# Altium PCB RPi_CWHUSKY_Target.PcbDoc (part 2 of 2)
Units mil, origin at the board's own origin, x right, y up, seen from the top; angles counter-clockwise.
Board outline 2623.51 x 2391.28 mil, 4 copper layers (Top Layer, Layer 1, Layer 2, Bottom Layer), stack 23.756 mil thick; 85 components, 89 nets, 390 pads, 172 vias.
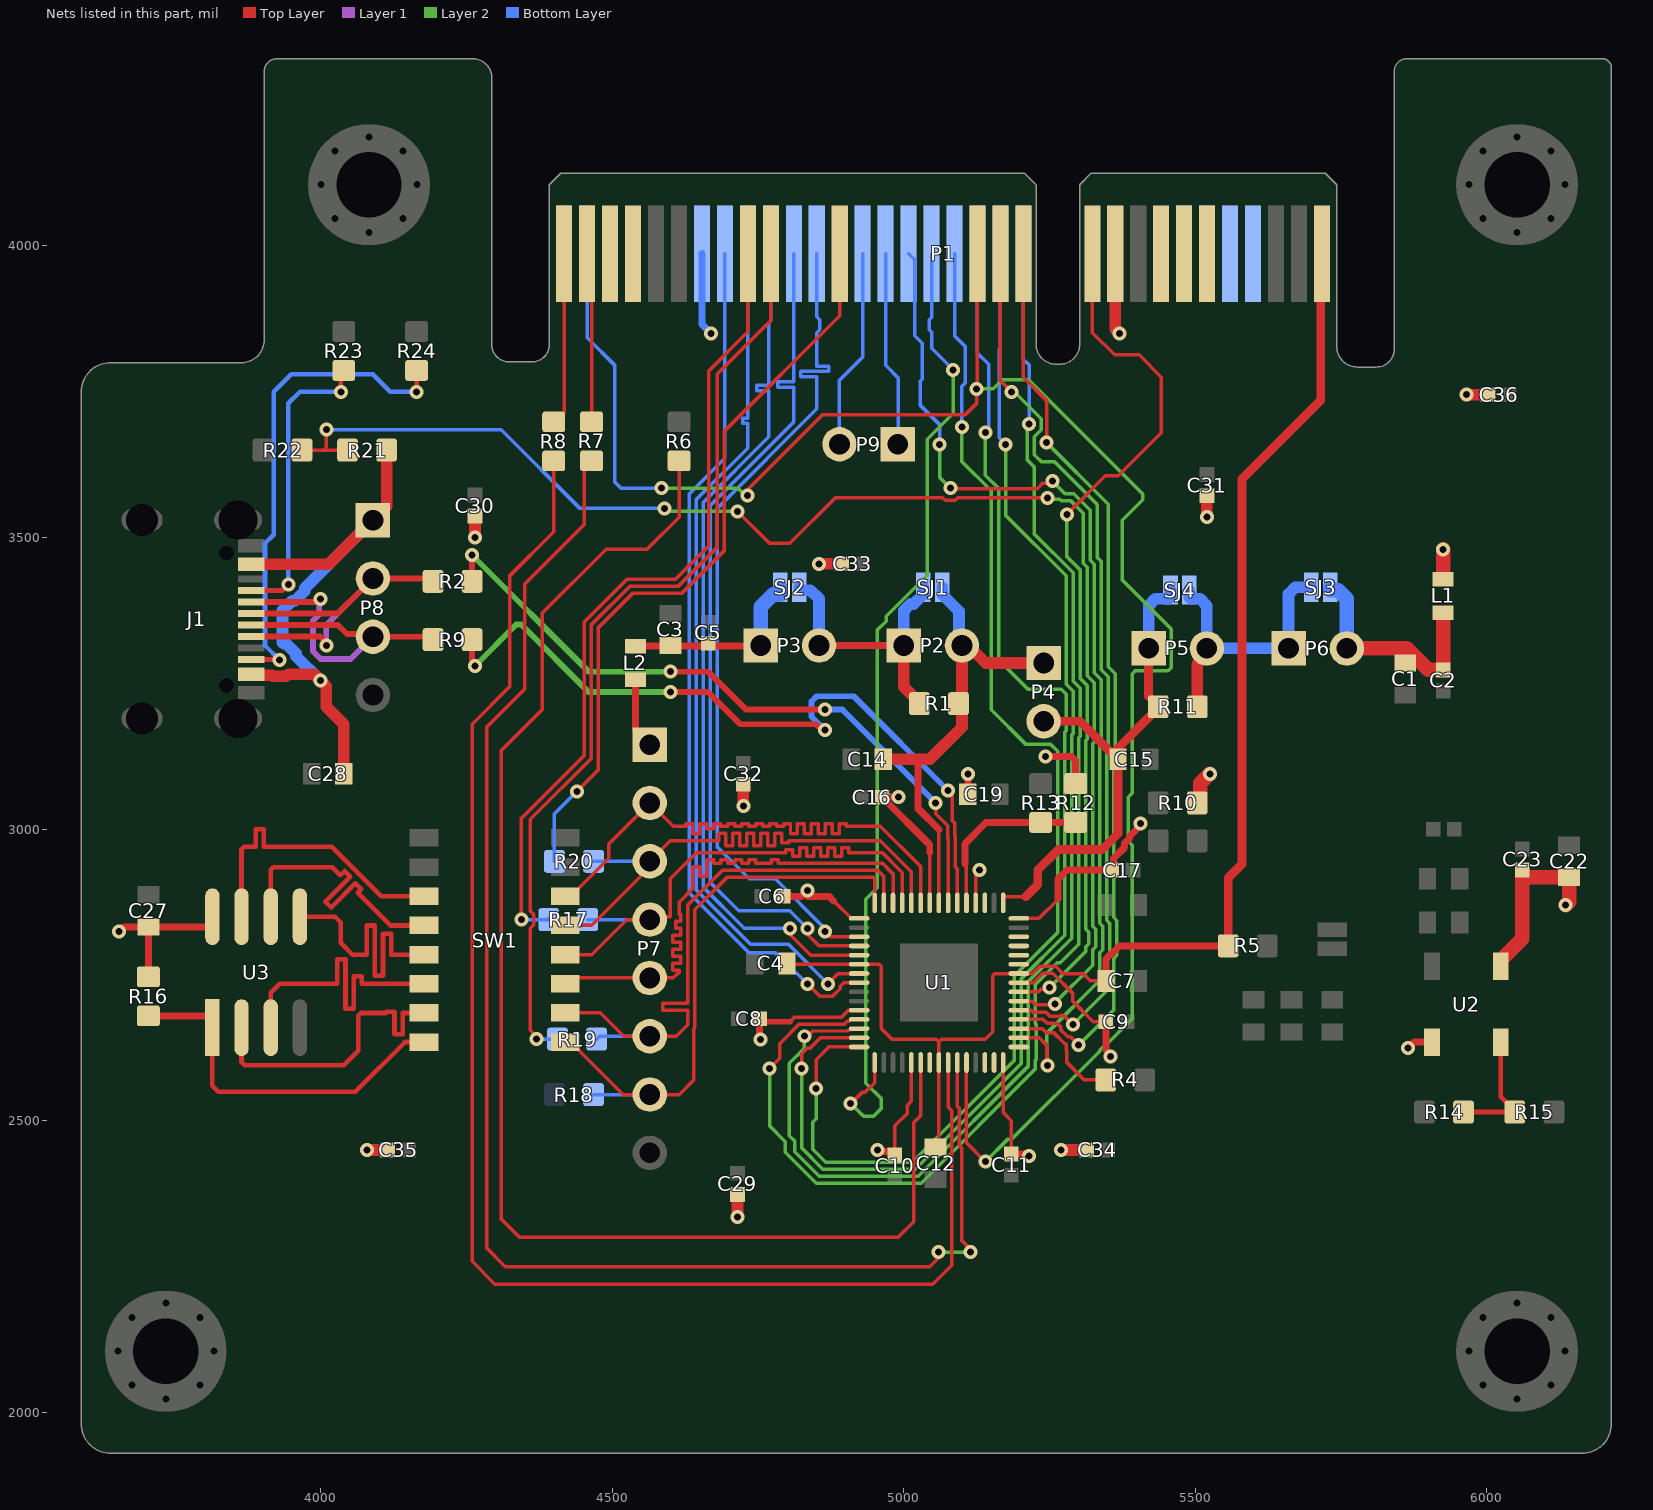
[diagram p4: the nets of this part, all layers, seen from the top]

## Via types
v1: diameter 24, hole 12, Top Layer to Bottom Layer, tented both sides, 166 vias
v2: diameter 24, hole 12, Top Layer to Bottom Layer, 6 vias

## Nets (pads, with @x,y where several pads share a name; then routed paths per layer and width w, separated by ;. In a path a pad name is that pad's centre, name@x,y a point inside that pad or via, vN(x,y) a via of type N, cw(c..) or ccw(c..) an arc to the next point about the centre after c; other vN are vias at no path point) (continued)
GPIO8: P1.A12 U1.12 | length 2366.3
  Top Layer w6: v1(4770,2590) 4787.46,2607.46 4787.46,2632.16 4821.3,2666 4898.58,2666 4903.59,2671.01 4906.6,2671.01 4909.41,2673.82 U1.12@4923.7,2673.82
  Layer 2 w6: v1(4770,2590) 4770,2491.36 4797.17,2464.2 4797.17,2445.86 4850.03,2393 4868.36,2393 5029.97,2393 5226,2589.03 5226,2603.7 5227,2604.7 5227,2665.35 5226,2666.35 5226,2734.03 5263.25,2771.28 5268.22,2771.28 5300,2803.06 5300,3156.57 5302.53,3159.1 5302.53,3241.41 5290.53,3253.41 5290.53,3439.47 5223.87,3506.13 5223.87,3621.13 5212,3633 5212,3692 v1(5215,3695)
  Bottom Layer w6: P1.A12@5205.36,3986.98 5205.36,3805.97 5215,3796.33 v1(5215,3695)
GPIO9: P1.A13 U1.13 | length 2286.2
  Top Layer w6: v1(4830,2645) 4834.87,2645 4843.87,2654 4903.55,2654 4904.81,2655.26 4906.6,2655.26 4909.41,2658.07 U1.13@4923.7,2658.07
  Layer 2 w6: v1(4830,2645) 4829.3,2644.3 4829.3,2624 4804,2598.7 4804,2474.33 4813,2465.33 4813,2447 4855,2405 5025,2405 5214,2594 5214,2739 5288,2813 5288,3161.54 5290.53,3164.07 5290.53,3236.44 5278.53,3248.44 5278.53,3434.5 5175.49,3537.54 5175.49,3659.51 v1(5175,3660)
  Bottom Layer w6: P1.A13@5165.99,3986.98 5165.99,3825.3 5164,3823.31 5164,3671 v1(5175,3660)
GPIO10: P1.A14 U1.14 | length 2260
  Top Layer w6: v1(4825,2590) 4825,2615 4834,2624 4838.7,2624 4856.7,2642 4923.38,2642 U1.14@4923.7,2642.32
  Layer 2 w6: v1(4825,2590) 4825,2453.33 4861.33,2417 5020.03,2417 5202,2598.97 5202,2743.97 5276,2817.97 5276,3166.51 5278.53,3169.04 5278.53,3231.47 5270,3240 5213.22,3240 5163.49,3289.73 5163.49,3583.49 5140,3606.97 v1(5140,3680)
  Bottom Layer w6: P1.A14@5126.62,3986.98 5126.62,3816.34 5146,3796.96 5146,3686 v1(5140,3680)
GPIO11: P1.A15 U1.15 | length 2183.4
  Top Layer w6: v1(4850,2555) 4850,2605 4871.57,2626.57 U1.15@4923.7,2626.57
  Layer 2 w6: v1(4850,2555) 4850,2503.72 4844,2497.72 4844,2451.3 4866.3,2429 5015.06,2429 5190,2603.94 5190,2748.94 5264,2822.94 5264,3133.7 5251.7,3146 5209,3146 5149.93,3205.07 5149.93,3580.07 5100,3630 v1(5100,3690)
  Bottom Layer w6: P1.A15@5087.25,3986.98 5087.25,3845.88 5106,3827.13 5106,3765.7 5100,3759.7 v1(5100,3690)
GPIO12: P1.A16 U1.16 | length 1714.7
  Top Layer w6: v1(4909.16,2529.75) 4909.75,2529.75 4929.36,2549.36 4934.36,2549.36 4950.28,2565.28 U1.16@4950.28,2600
  Layer 2 w6: v1(4909.16,2529.75) 4929.8,2509.12 4930.62,2509.12 4931.54,2508.2 4948.93,2508.2 4961.23,2520.5 4961.23,2538.46 4935,2564.7 4935,2880 4954.71,2899.71 4954.71,3341.5 4970,3356.78 4970,3365 5040.53,3435.53 5040.53,3668.7 5085,3713.17 v1(5085,3787.59)
  Bottom Layer w6: P1.A16@5047.88,3986.98 5047.88,3877.58 5044,3873.7 5044,3856.3 5047.88,3852.42 5047.88,3824.71 v1(5085,3787.59)
GPIO17: U1.28
GPIO18: U1.29
GPIO19: U1.31
GPIO20: P1.A17 U1.32 | length 1790.5
  Top Layer w6: v1(5080,3585) 5081,3584 5229.24,3584 5238.8,3593.56 5251.53,3593.56 v1(5254.97,3597) ; U1.32@5197.32,2642.32 5232.68,2642.32 5245,2630 5245,2597 v1(5247,2595)
  Layer 2 w6: v1(5061.53,3660) 5061.53,3603.47 v1(5080,3585) ; v1(5247,2595) 5245,2597 5245,2649.7 5336,2740.7 5336,2788.15 5341.47,2793.62 5341.47,2833.38 5336,2838.85 5336,3141.66 5338.53,3144.19 5338.53,3256.32 5326.53,3268.32 5326.53,3385.72 ; v1(5254.97,3597) 5276.69,3575.28 5283.72,3575.28 5291.39,3575.28 5320,3546.67 5320,3460.91 5326.53,3454.38 5326.53,3388.66
  Bottom Layer w6: P1.A17@5008.51,3986.98 5019.29,3976.2 5019.29,3845.78 5031.93,3833.14 5031.93,3771.61 5028.11,3767.79 5028.11,3727.34 5061.53,3693.92 v1(5061.53,3660)
GPIO21: R4.2 U1.33 | length 203.3
  Top Layer w6: U1.33@5197.32,2658.07 5238.03,2658.07 5244.77,2651.33 5257,2651.33 5276.33,2632 5278,2632 5279,2631 5279,2621.3 5280,2620.3 5280,2600 5310,2570 R4.2@5346.54,2570
GPIO24: R21.2 R22.1 U1.36 | length 2487.4
  Top Layer w6: R22.1@3968.46,3650 4005,3650 ; v1(4010,3685) 4010,3655 4005,3650 ; R21.2@4046.54,3650 4005,3650 ; v1(4715,3545) 4770,3490 4805,3490 4883.08,3568.08 5067.22,3568.08 5071.3,3564 5088.7,3564 5092.78,3568.08 v1(5246.99,3568.08) ; U1.36@5197.32,2705.31 5219.99,2705.31 5226.3,2699 5258.47,2699 v1(5259.61,2700.13)
  Layer 2 w6: v1(4590,3550) 4595,3545 v1(4715,3545) ; v1(5246.99,3568.08) 5249.29,3565.78 5267.99,3565.78 5270.99,3562.78 5286.92,3562.78 5308,3541.7 5308,3455.94 5314.53,3449.41 5314.53,3263.35 5326.53,3251.35 5326.53,3149.16 5324,3146.63 5324,2833.88 5329.47,2828.41 5329.47,2798.59 5324,2793.12 5324,2767 5259.61,2702.61 v1(5259.61,2700.13)
  Bottom Layer w6: v1(4010,3685) 4310,3685 4445,3550 v1(4590,3550)
GPIO26_ADC0: U1.40
GPIO27_ADC1: U1.41
GPIO28_ADC2: U1.42
GPIO29_ADC3: U1.43
HDR10: P1.A18 P9.1 | length 336.5
  Bottom Layer w6: P1.A18@4969.14,3986.98 4969.14,3795.56 4991,3773.7 4991,3661 P9.1@4990,3660
IOVREF: C6.1 C8.1 C9.1 C10.1 C11.1 C16.1 C17.1 C19.1 C22.1 C23.1 C27.1 C29.1 C30.1 C31.1 C32.1 C33.1 C34.1 C35.1 C36.1 L1.2 L2.1 P1.A5 P1.A26 P1.B10 P7.1 R10.1 R12.1 R16.1 U1.1 U1.11 U1.20 U1.30 U1.38 U1.45 U1.49 U1.54 U2.1 U2.4 U3.8 | length 3202.6
  Top Layer w6: 4805,2670 4813,2678 4893.61,2678 4904.82,2689.21 4923.34,2689.21 U1.11@4923.7,2689.57 ; 4880,2876.97 4909.92,2847.05 U1.1@4923.7,2847.05 ; C10.1@4985,2441.22 4985,2491.36 5005.77,2512.13 5005.77,2525.77 5013.27,2533.27 U1.20@5013.27,2600 ; U1.54@5044.76,2873.62 5044.76,2960.24 ; U1.49@5123.5,2873.62 5123.5,2923.5 v1(5130,2930) ; U1.30@5170.75,2600 5170.75,2514.25 5184.76,2500.24 C11.1@5184.76,2443.11 ; U1.38@5197.32,2736.81 5222.11,2736.81 5238.3,2753 5255.7,2753 5290.38,2718.32 5290.38,2704.68 5325.06,2670 C9.1@5346.65,2670 ; U1.45@5197.32,2847.05 5232.05,2847.05 5265,2880
  Top Layer w10: C8.1@4753.11,2675 4758.11,2670 4805,2670
  Top Layer w12: v1(3655,2825) 3662.44,2832.44 C27.1@3705,2832.44 ; R16.1@3705,2746.93 C27.1@3705,2832.44 ; U3.8@3814.76,2850 3814.76,2838.24 3808.97,2832.44 C27.1@3705,2832.44 ; L2.1@4540,3256.26 4540,3169.76 P7.1@4564.76,3145 ; C8.1@4753.11,2675 4753.19,2674.92 4753.19,2640.65 v1(4754.49,2639.35) ; C6.1@4793.11,2885 4825,2885 v1(4835,2895) ; v1@4835,2885 4871.97,2885 4880,2876.97 ; v1(4955,2450) 4957.3,2447.7 4978.52,2447.7 C10.1@4985,2441.22 ; v1(4991,3055) C16.1@4963.11,3055 5044.76,2973.35 5044.76,2960.24 ; C19.1@5110,3060 v1(5110,3095) ; C11.1@5184.76,2443.11 5211.89,2443.11 v1(5215,2440) ; v1(5243,3125) 5287.97,3125 5295,3117.97 R12.1@5295,3078.46 ; 5265,2880 5265,2915 5280,2930 C17.1@5356.89,2930 5360,2933.11 5360,2950 5379.09,2969.09 5379.09,2976.2 5386.94,2984.04 5386.94,2987.29 5406,3006.35 v1(5406,3009.59) ; C9.1@5346.65,2670 5346.65,2621.59 5354.87,2613.37 v1(5354.87,2610.13) ; v1(5865,2625) 5875,2635 U2.1@5905.94,2635
  Top Layer w20: v1(4080,2450) C35.1@4116.89,2450 ; v1(4265,3500) C30.1@4265,3536.89 ; v1(4715,2335) C29.1@4715,2376.89 ; v1(4725,3040) C32.1@4725,3076.89 ; v1(4855,3455) C33.1@4896.89,3455 ; v1(5270,2450) C34.1@5311.89,2450 ; P1.B10@5362.84,3986.98 5362.84,3857.16 v1(5370,3850) ; v1(5520,3535) C31.1@5520,3571.89 ; v1(5965,3745) C36.1@6001.89,3745
  Top Layer w25: R10.1@5503.46,3045 5508.68,3050.22 5508.68,3078.68 v1(5525,3095) ; L1.2@5925,3428.74 v1(5925,3480) ; U2.4@6024.06,2764.92 6024.06,2775.16 6060.94,2812.05 6060.94,2915 6063.39,2917.44 C22.1@6140.94,2917.44 6140.94,2875.94 v1(6135,2870)
  Bottom Layer w12: P1.A26@4654.18,3986.98 4654.18,3865.82 v1(4670,3850)
JTAG_TCK: P1.B32 R8.2 | length 296.7
  Top Layer w6: R8.2@4400,3698.46 4401.19,3698.46 4417.96,3715.23 P1.B32@4417.96,3986.98
JTAG_TDI: P1.B29
JTAG_TDO: P1.B30
JTAG_TMS: P1.B31 R7.2 | length 291.7
  Top Layer w6: P1.B31@4457.33,3986.98 4465,3979.31 R7.2@4465,3698.46
JTAG_TRST: P1.A32
LED1: P1.B11 U1.37 | length 1513.6
  Top Layer w6: U1.37@5197.32,2721.06 5231.19,2721.06 5235.35,2725.22 5246.89,2725.22 v1(5250.33,2728.67) ; v1(5280,3540) 5346,3606 5367.97,3606 5442,3680.03 5442,3774.97 5403.72,3813.25 5361.75,3813.25 5323.47,3851.53 P1.B11@5323.47,3986.98
  Layer 2 w6: v1(5250.33,2728.67) 5312,2790.33 5312,2798.09 5317.47,2803.56 5317.47,2823.44 5312,2828.91 5312,3151.6 5314.53,3154.13 5314.53,3236.83 5314.53,3246.38 5302.53,3258.38 5302.53,3444.44 5280,3466.97 v1(5280,3540)
LED2: P1.B12 U1.34 | length 1576.1
  Top Layer w6: U1.34@5197.32,2673.82 5239.25,2673.82 5245.94,2667.13 5262.87,2667.13 5269,2661 5269,2656.3 5281.3,2644 5286,2644 v1(5300,2630) ; P1.B12@5205.36,3986.98 5205.36,3774.64 5245,3735 v1(5245,3663)
  Layer 2 w6: v1(5245,3663) 5350.53,3557.47 5350.53,3278.27 5362.53,3266.27 5362.53,3134.25 5360,3131.72 5360,2848.79 5365.47,2843.32 5365.47,2783.68 5360,2778.21 5360,2690 v1(5300,2630)
LED3: P1.B13 U1.35 | length 1558.2
  Top Layer w6: P1.B13@5165.99,3986.98 5165.99,3769.01 v1(5185,3750) ; U1.35@5197.32,2689.57 5197.68,2689.21 5219.12,2689.21 5222.51,2685.82 5244.22,2685.82 5250.91,2679.13 5268.3,2679.13 5270.17,2681 5274,2681 v1(5290,2665)
  Layer 2 w6: v1(5185,3750) 5189.7,3750 5236,3703.7 5236,3685 5224,3673 5224,3642.3 5236.3,3630 5258.7,3630 5332,3556.7 5332,3465.88 5338.53,3459.35 5338.53,3273.3 5350.53,3261.3 5350.53,3139.22 5348,3136.69 5348,2843.82 5353.47,2838.35 5353.47,2788.65 5348,2783.18 5348,2723 v1(5290,2665)
MISO: P1.B23 R19.2 | length 1611.9
  Top Layer w6: v1(4370.24,2640) 4370.24,2644.87 4360,2655.11 4360,2830.3 4366,2836.3 4366,2853.7 4360,2859.7 4360,3016.97 4464,3120.97 4464,3350.06 4530.94,3417 4613.97,3417 4680,3483.03 4680,3780 4772.29,3872.29 P1.B23@4772.29,3986.98
  Bottom Layer w6: v1(4370.24,2640) R19.2@4406.54,2640
MOSI: P1.B24 R17.2 | length 1400.6
  Top Layer w6: v1(4345,2845) 4344,2846 4344,3017.94 4452,3125.94 4452,3355.03 4525.97,3429 4609,3429 4666.18,3486.18 4666.18,3786.18 4732.92,3852.92 P1.B24@4732.92,3986.98
  Bottom Layer w6: v1(4345,2845) R17.2@4391.54,2845 R17.2@4390.2,2846.34
NetC1_1: C1.1 C2.1 L1.1 P6.2 SJ3.2 | length 403.6
  Top Layer w25: P6.2@5760,3310 5862.75,3310 5899.64,3273.11 C2.1@5925,3273.11 L1.1@5925,3371.26
  Bottom Layer w25: SJ3.2@5731.22,3415 5731.22,3410 5745.36,3410 5760,3395.36 P6.2@5760,3310
NetC3_1: C3.1 C5.1 L2.2 P3.1 SJ2.1 | length 336.8
  Top Layer w12: L2.2@4540,3313.74 4753.74,3313.74 P3.1@4755,3315
  Bottom Layer w25: P3.1@4755,3315 4755,3381.22 4776.28,3402.5 4788.78,3402.5 SJ2.1@4788.78,3415
NetC14_1: C14.1 P2.2 P4.1 R1.2 SJ1.2 U1.53 | length 825.2
  Top Layer w6: U1.53@5060.51,2873.62 5060.51,2999.49
  Top Layer w12: 5025,3120 5025,3035 5060.51,2999.49
  Top Layer w20: C14.1@4965.12,3120 5025,3120 5045,3120 5100,3175 P2.2@5100,3315 5110.57,3315 5140.57,3285 P4.1@5240,3285
  Bottom Layer w20: SJ1.2@5066.22,3415 5066.22,3402.5 5095,3373.72 5095,3320 P2.2@5100,3315
NetC28_1: C28.1 J1.A4-B9 J1.B4-A9 P8.1 R21.1 | length 1043.4
  Top Layer w20: J1.B4-A9@3881.34,3265.51 3883.15,3263.7 3916.7,3263.7 3918.4,3262 3941.6,3262 3945.11,3265.51 3989.49,3265.51 v1(3999.74,3255.26) 4010,3245 4010,3210 4040.12,3179.88 C28.1@4040.12,3095 ; J1.A4-B9@3881.34,3454.49 4014.49,3454.49 P8.1@4090,3530 4113.46,3553.46 R21.1@4113.46,3650
  Bottom Layer w20: v1(3999.74,3255.26) 3958,3297 3958,3301.6 3941.6,3318 3937,3318 3935,3320 3935,3375 3952,3392 3956.6,3392 3973,3408.4 3973,3413 P8.1@4090,3530
NetJ1_A5: J1.A5 R23.1 | length 515
  Top Layer w8: J1.A5@3881.34,3409.21 3934.21,3409.21 v2(3945,3420) ; v2(4035,3750) 4035,3781.54 R23.1@4040,3786.54
  Bottom Layer w8: v2(3945,3420) 3945,3730 3965,3750 v2(4035,3750)
NetJ1_B5: J1.B5 R24.1 | length 832.1
  Top Layer w8: J1.B5@3881.34,3291.1 3928.9,3291.1 v2(3930,3290) ; v2(4165,3750) R24.1@4165,3786.54
  Bottom Layer w8: v2(3930,3290) 3905,3315 3905,3490 3920,3505 3920,3750 3950,3780 4090,3780 4120,3750 v2(4165,3750)
NetP2_1: P2.1 P3.2 R1.1 SJ1.1 SJ2.2 | length 496.9
  Top Layer w12: P3.2@4855,3315 P2.1@5000,3315
  Top Layer w20: P2.1@5000,3315 5000,3244.28 5027.05,3217.23 R1.1@5027.05,3215.26
  Bottom Layer w20: SJ2.2@4821.22,3415 4821.22,3412.5 4823.72,3410 4840,3410 4855,3395 P3.2@4855,3315 ; P2.1@5000,3315 5000,3374.53 5011.72,3386.24 5017.53,3386.24 5033.78,3402.5 SJ1.1@5033.78,3415
NetP5_2: P5.2 P6.1 R11.2 SJ3.1 SJ4.2 | length 505.4
  Top Layer w20: R11.2@5503.46,3210 5503.46,3282.9 5520,3299.43 P5.2@5520,3310
  Bottom Layer w20: SJ4.2@5490,3410 5490,3397.5 5492.5,3395 5508.28,3395 5520,3383.28 P5.2@5520,3310 P6.1@5660,3310 5660,3403.28 5671.72,3415 SJ3.1@5698.78,3415
NetR14_2: R14.2 R15.1 U2.3 | length 218
  Top Layer w8: R14.2@5960,2515 R15.1@6048.07,2515 6048.07,2517.2 6024.06,2541.22 U2.3@6024.06,2635
NetR16_2: R16.2 SW1.16 U3.1 | length 628.2
  Top Layer w8: U3.1@3814.76,2659.76 3814.76,2560.24 3825,2550 4060,2550 4145,2635 SW1.16@4177.64,2635
  Top Layer w12: R16.2@3705,2680 3808.49,2680 3814.76,2673.73 U3.1@3814.76,2659.76
NetSW1_11: SW1.11 U3.7 | length 524.7
  Top Layer w8: U3.7@3864.76,2850 3864.76,2965.31 3869.45,2970 3885,2970 3889,2970 3889,2999.67 3903,2999.67 3903,2970 3995,2970 4019.53,2970 4104.53,2885 SW1.11@4177.64,2885
NetSW1_12: SW1.12 U3.6 | length 524.7
  Top Layer w8: U3.6@3914.76,2850 3914.76,2930.31 3919.45,2935 4020,2935 4031.25,2923.75 4034.08,2920.92 4041.44,2928.29 4051.34,2918.39 4008.62,2875.67 4018.52,2865.77 4060,2907.24 4069.89,2897.34 4063.78,2891.22 4090,2865 4095,2860 4120,2835 SW1.12@4177.64,2835
NetSW1_13: SW1.13 U3.5 | length 504.3
  Top Layer w8: U3.5@3964.76,2850 4025,2850 4035,2840 4035,2805 4055,2785 4075.25,2785 4079.25,2785 4079.25,2835 4093.25,2835 4093.25,2749 4107.25,2749 4107.25,2821 4121.25,2821 4121.25,2785 4130,2785 SW1.13@4177.64,2785
NetSW1_14: SW1.14 U3.3 | length 524.7
  Top Layer w8: U3.3@3914.76,2659.76 3914.76,2719.76 3930,2735 4025,2735 4029,2735 4029,2777.2 4043,2777.2 4043,2692.11 4057,2692.11 4057,2747.66 4071,2747.66 4071,2735 4120,2735 SW1.14@4177.64,2735
NetSW1_15: SW1.15 U3.2 | length 524.4
  Top Layer w8: U3.2@3864.76,2659.76 3864.76,2600.24 3870,2595 4040,2595 4065,2620 4065,2680.31 4069.69,2685 4070,2685 4070.62,2685 4113,2685 4113,2687.02 4127,2687.02 4127,2648.42 4141,2648.42 4141,2685 4145,2685 SW1.15@4177.64,2685
nRST: P1.A31 P1.B14 U1.26 | length 3297.8
  Top Layer w6: v1(4732.51,3572.49) 4730,3575 4730,3580 4861,3711 5106,3711 5125,3730 v1(5125,3755) 5126.62,3756.62 P1.B14@5126.62,3986.98 ; U1.26@5107.76,2600 5107.76,2462.24 v1(5140,2430)
  Layer 2 w6: v1(4585,3585) 4715.31,3585 4727.82,3572.49 v1(4732.51,3572.49) ; v1(5125,3755) 5153.78,3755 5169.78,3771 5213.7,3771 5410,3574.7 5410,3565 5374.53,3529.53 5374.53,3427.26 5458.53,3343.26 5458.53,3276.74 5453.26,3271.47 5397.26,3271.47 5392,3266.22 5392,3062 5385,3055 5385,2979.73 5392,2972.73 5392,2675.33 5345.67,2629 5344.05,2629 5336,2620.95 5336,2619.33 5184.67,2468 5178,2468 v1(5140,2430)
  Bottom Layer w6: P1.A31@4457.33,3986.98 4457.33,3842.67 4505,3795 4505,3595 4515,3585 v1(4585,3585)
nRST_OUT: P1.A19 P9.2 | length 343.5
  Bottom Layer w6: P9.2@4890,3660 4890,3770 4929.77,3809.77 P1.A19@4929.77,3986.98
QSPI_SCLK: P7.3 R20.2 SW1.5 U1.56 | length 1031
  Top Layer w6: SW1.5@4419.76,2835 4465,2835 4564.76,2934.76 P7.3@4564.76,2945 4599.76,2980 4680,2980 4683,2980 4683,2993 4695,2993 4695,2972 4707,2972 4707,2993 4719,2993 4719,2972 4731,2972 4731,2993 4743,2993 4743,2972 4755,2972 4755,2993 4767,2993 4767,2972 4779,2972 4779,2993 4791,2993 4791,2977.12 4803,2977.12 4803,2980 4835,2980 4960,2980 5013.27,2926.73 U1.56@5013.27,2873.62
  Bottom Layer w6: R20.2@4468.23,2945 P7.3@4564.76,2945
QSPI_SD0: P7.4 R17.1 SW1.4 U1.57 | length 983
  Top Layer w6: SW1.4@4419.76,2785 4465,2785 4525,2845 P7.4@4564.76,2845 4569.76,2850 4600,2850 4600,2915 4645,2960 4795,2960 4798,2960 4798,2965.12 4810,2965.12 4810,2954 4822,2954 4822,2968 4834,2968 4834,2954 4846,2954 4846,2968 4858,2968 4858,2954 4870,2954 4870,2968 4882,2968 4882,2954 4894,2954 4894,2968 4906,2968 4906,2960 4910,2960 4963.03,2960 4997.52,2925.51 U1.57@4997.52,2873.62
  Bottom Layer w6: R17.1@4458.46,2845 P7.4@4564.76,2845
QSPI_SD1: P7.6 R19.1 SW1.2 U1.59 | length 1031
  Top Layer w6: SW1.2@4419.76,2685 4480,2685 4520,2645 P7.6@4564.76,2645 4610,2645 4630,2665 4630,2686.25 4630,2689.25 4586.62,2689.25 4586.62,2701.25 4630,2701.25 4630,2745 4630,2870 4690,2930 4955,2930 4966.02,2918.98 U1.59@4966.02,2873.62
  Bottom Layer w6: R19.1@4473.46,2640 4478.46,2645 P7.6@4564.76,2645
QSPI_SD2: P7.5 SW1.3 U1.58 | length 998.6
  Top Layer w6: SW1.3@4419.76,2735 4429.76,2745 P7.5@4564.76,2745 4605,2745 4614.92,2754.92 4615,2755 4615,2757.92 4604.06,2757.92 4604.06,2769.92 4618,2769.92 4618,2781.92 4604.06,2781.92 4604.06,2793.92 4618,2793.92 4618,2805.92 4604.06,2805.92 4604.06,2817.92 4618,2817.92 4618,2829.92 4608.87,2829.92 4608.87,2841.92 4618,2841.92 4618,2853.92 4615,2853.92 4615,2860 4615,2875 4635,2895 4638,2898 4638,2936.03 4650,2936.03 4650,2918.97 4662,2918.97 4662,2948 4674,2948 4674,2941.31 4686,2941.31 4686,2948 4698,2948 4698,2942 4710,2942 4710,2948 4722,2948 4722,2942 4734,2942 4734,2948 4746,2948 4746,2942 4770,2942 4773,2942 4773,2948 4785,2948 4785,2942 4790,2942 4963,2942 4981.77,2923.23 U1.58@4981.77,2873.62
QSPI_SD3: P7.2 SW1.6 U1.55 | length 1031
  Top Layer w6: SW1.6@4419.76,2885 4429.41,2885 4494.4,2949.99 4494.4,2974.64 P7.2@4564.76,3045 4604.76,3005 4623,3005 4626,3005 4626,3008.97 4638,3008.97 4638,2992 4650,2992 4650,3008.97 4662,3008.97 4662,3000.94 4674,3000.94 4674,3008.97 4686,3008.97 4686,3005 4698,3005 4698,3008.97 4710,3008.97 4710,3005 4722,3005 4722,3008.97 4734,3008.97 4734,3005 4746,3005 4746,3008.97 4758,3008.97 4758,3005 4770,3005 4770,3008.97 4782,3008.97 4782,3005 4794,3005 4794,3008.97 4806,3008.97 4806,2992 4818,2992 4818,3008.97 4830,3008.97 4830,2992 4842,2992 4842,3008.97 4854,3008.97 4854,2992 4866,2992 4866,3008.97 4878,3008.97 4878,2992 4890,2992 4890,3008.97 4902,3008.97 4902,3004.99 4914,3004.99 4945.3,3005 4960,3005 5029.02,2935.98 U1.55@5029.02,2873.62
QSPI_SS: P7.7 R18.2 SW1.1 U1.60 | length 1031
  Top Layer w6: SW1.1@4419.76,2635 4429.41,2635 4519.41,2545 P7.7@4564.76,2545 4615,2545 4640,2570 4640,2658.03 4642,2660.03 4642,2862 4698,2918 4946.76,2918 4950.28,2914.49 U1.60@4950.28,2873.62
  Bottom Layer w6: R18.2@4468.23,2545 P7.7@4564.76,2545
SC: R8.1 U1.24 | length 2632.6
  Top Layer w6: R8.1@4400,3631.54 4400,3510 4325,3435 4325,3245 4260,3180 4260,2259.12 4299.12,2220 5050,2220 5082.46,2252.46 5082.46,2517.54 5076.26,2523.74 U1.24@5076.26,2600
SCK: P1.B20 R20.1 | length 1293.8
  Top Layer w6: v1(4440,3065) 4476,3101 4476,3345.09 4535.91,3405 4620,3405 4692,3477 4692,3682 4890.4,3880.4 P1.B20@4890.4,3986.98
  Bottom Layer w6: R20.1@4401.3,2945 4401.3,3026.3 v1(4440,3065)
SD: R7.1 U1.25 | length 2618
  Top Layer w6: R7.1@4465,3631.54 4452.74,3619.28 4452.74,3522.74 4350,3420 4350,3240 4284.8,3174.8 4284.8,2282.3 4317.1,2250 5045,2250 5060,2265 v1(5060,2275) ; U1.25@5092.01,2600 5092.01,2524.96 5095.76,2521.21 5095.76,2457.27 5100,2453.03 5100,2294.06 5114.57,2279.49 v1(5114.57,2274.69)
  Layer 2 w6: v1(5060,2275) 5060.16,2274.84 5114.41,2274.84 v1(5114.57,2274.69)
SHUNTL: C4.1 C7.1 C12.1 P1.B1 R5.2 U1.6 U1.23 U1.39 | length 2415.4
  Top Layer w6: C4.1@4800,2770 4801.69,2768.31 U1.6@4923.7,2768.31 4958.18,2768.31 4961.69,2764.79 4961.69,2658.31 4980,2640 5056.02,2640 5060.51,2635.51 ; C12.1@5054.76,2455 5060.51,2460.75 U1.23@5060.51,2600 5060.51,2635.51 ; C7.1@5347.2,2740 5320,2740 5307.44,2752.56 5273.11,2752.56 5260.67,2765 5233.33,2765 5221.33,2753 5220.89,2752.56 U1.39@5197.32,2752.56 5156.07,2752.56 5152.56,2749.04 5152.56,2652.56 5140,2640 5065,2640 5060.51,2635.51
  Top Layer w12: C7.1@5347.2,2740 5347.2,2777.2 5370,2800 R5.2@5556.54,2800
  Top Layer w15: R5.2@5556.54,2800 5556.54,2916.54 5580,2940 5580,3600 5715.26,3735.26 P1.B1@5715.26,3925
TRACECLK: P1.A21 U1.3 | length 1498.6
  Top Layer w6: v1(4865,2825) 4874.45,2815.55 U1.3@4923.7,2815.55
  Bottom Layer w6: P1.A21@4851.03,3986.98 4851.03,3878.67 4856,3873.7 4856,3856.3 4851.03,3851.33 4851.03,3835 4851.03,3794 4871.76,3794 4871.76,3785 4823.66,3785 4823.66,3776 4851.03,3776 4851.03,3773 4851.03,3720.71 4680,3549.69 4680,2970 4735,2915 4779.7,2915 4865,2829.7 v1(4865,2825)
TRACED0: P1.A22 U1.4 | length 1498.6
  Top Layer w6: v1(4835,2830) 4835,2820 4855.2,2799.8 U1.4@4923.7,2799.8
  Bottom Layer w6: P1.A22@4811.66,3986.98 4811.66,3825 4811.66,3767 4784.43,3767 4784.43,3758 4811.66,3758 4811.66,3755 4811.66,3698.31 4668,3554.66 4668,2909.29 4717.29,2860 4805,2860 v1(4835,2830)
TRACED1: P1.A23 U1.5 | length 1498.6
  Top Layer w6: v1(4805,2830) 4805,2820 4840.94,2784.06 U1.5@4923.7,2784.06
  Bottom Layer w6: P1.A23@4772.29,3986.98 4772.29,3871.98 4769,3868.7 4769,3805 4769,3761 4747.8,3761 4747.8,3752 4769,3752 4769,3749 4769,3672.63 4656,3559.63 4656,2900.97 4726.97,2830 v1(4805,2830)
TRACED2: P1.A24 U1.7 | length 1498.6
  Top Layer w6: v1(4870,2735) 4887.56,2752.56 U1.7@4923.7,2752.56
  Bottom Layer w6: P1.A24@4732.92,3986.98 4732.92,3800 4732.92,3705 4724.37,3705 4724.37,3696 4732.92,3696 4732.92,3693 4732.92,3653.51 4644,3564.6 4644,2896 4737.5,2802.5 4802.5,2802.5 v1(4870,2735)
TRACED3: P1.A25 U1.8 | length 1498.6
  Top Layer w6: v1(4835,2735) 4856,2714 4878.7,2714 4891,2726.3 4891,2730.83 4896.98,2736.81 U1.8@4923.7,2736.81
  Bottom Layer w6: P1.A25@4693.55,3986.98 4693.55,3636.13 4632,3574.58 4632,2891.03 4734.52,2788.51 4779.52,2788.51 4815.03,2753 4817,2753 v1(4835,2735)
USB_DM: J1.A7 J1.B7 P8.3 R9.2 | length 662.3
  Top Layer w10: J1.A7@3881.34,3350.16 4029.84,3350.16 4045.47,3334.53 4085.47,3334.53 P8.3@4090,3330 4188.07,3330 R9.2@4193.07,3325 ; J1.B7@3881.34,3389.53 3994.53,3389.53 v1(4000,3395)
  Layer 1 w10: v1(4000,3395) 3998,3393 3998,3368 3987,3357 3987,3305.47 4000.47,3292 4052,3292 P8.3@4090,3330
USB_DMX: R9.1 U1.51 | length 1314
  Top Layer w6: v1(5076.21,3066.21) 5076.21,3063.79 5083.5,3056.5 5083.5,3014.68 5087.51,3010.67 5087.51,2989.46 5088.26,2988.71 5088.26,2935.53 5092.01,2931.78 U1.51@5092.01,2873.62
  Top Layer w10: R9.1@4260,3325 4260,3285 v1(4265,3280) ; v1(4600,3235) 4665,3235 4720,3180 4850,3180 4860,3170 v1(4865,3170)
  Layer 2 w10: v1(4265,3280) 4335.86,3350.86 4344.14,3350.86 4460,3235 v1(4600,3235)
  Bottom Layer w10: v1(4865,3170) 4842,3193 4842,3219.14 4850.86,3228 4914.43,3228 v1(5076.21,3066.21)
USB_DP: J1.A6 J1.B6 P8.2 R2.2 | length 624.9
  Top Layer w10: J1.B6@3881.34,3330.47 3999.53,3330.47 4010,3320 v1(4010,3315) ; J1.A6@3881.34,3369.84 4029.84,3369.84 P8.2@4090,3430 4188.07,3430 R2.2@4193.07,3425
  Layer 1 w10: v1(4010,3315) 4010,3350 P8.2@4090,3430
USB_DPX: R2.1 U1.52 | length 1196.2
  Top Layer w6: v1(5055,3045) 5055,3026.21 5075.51,3005.7 5075.51,2984.49 5076.26,2983.74 U1.52@5076.26,2873.62
  Top Layer w10: R2.1@4260,3425 v1(4260,3470) ; v1(4600,3270) 4665,3270 4730,3205 v1(4865,3205)
  Layer 2 w10: v1(4260,3470) 4460,3270 v1(4600,3270)
  Bottom Layer w10: v1(4865,3205) 4895,3205 v1(5055,3045)
VCC1.0: P1.B6
VCC1.2: P1.B7
VCC1.8: P1.B8
VCC2.5: P1.A4
VCC5.0: P1.A6
VCCADJ: P1.A7
VREG_AVDD: C15.1 P4.2 P5.1 R11.1 SJ4.1 U1.46 | length 897.3
  Top Layer w6: U1.46@5170.75,2873.62 5170.75,2883.54 5171.61,2884.4 5209.4,2884.4
  Top Layer w15: 5209.4,2884.4 5230,2905 5230,2930 5265,2965 5340,2965 5367.44,2992.44 C15.1@5367.44,3120 5367.44,3123.94 5360.18,3131.2 C15.1@5359.7,3131.2 ; P4.2@5240,3185 5302.44,3185 5356.24,3131.2 C15.1@5359.7,3131.2 ; P5.1@5420,3310 5420,3228.5 5436.54,3211.97 R11.1@5436.54,3210 5436.54,3208.03 C15.1@5359.7,3131.2
  Bottom Layer w20: P5.1@5420,3310 5420,3383.28 5431.72,3395 5455.07,3395 5457.57,3397.5 SJ4.1@5457.57,3410
VREG_FB: R12.2 R13.1 U1.50 | length 307.7
  Top Layer w6: 5105,2940 5107.76,2937.24 U1.50@5107.76,2873.62
  Top Layer w12: 5105,2940 5105,2975 5141.54,3011.54 R12.2@5295,3011.54
VREG_LX: U1.48
XIN: R6.1 U1.21 | length 2476.5
  Top Layer w6: R6.1@4615,3631.54 4615,3535 4560,3480 4490,3480 4380,3370 4380,3205 4310,3135 4310,2331.58 4341.58,2300 4990,2300 5017.01,2327.01 5017.01,2497.01 5029.02,2509.02 U1.21@5029.02,2600
XOUT: U1.22
pads on no net: J1. J1.A8 J1.B8 P1.A30 P1.B25 P1.B28 R1.0 R2.0 R3.0 R4.0 R5.0 R6.0 R7.0 R8.0 R9.0 R10.0 R11.0 R12.0 R13.0 R14.0 R15.0 R16.0 R17.0 R18.0 R19.0 R20.0 R21.0 R22.0 R23.0 R24.0 SW1.7 SW1.8 SW1.9 SW1.10

## Polygon pours and split planes (outlines as drawn)
IOVREF on Layer 2 "IOVREF_L03_P001" (solid, remove dead copper, pour order 1): 3430,4590 3440,4600 6575,4600 6575,1860 6435,1720 3390,1720
GND on Layer 1 "GND_L02_P000" (solid, remove dead copper, pour order 0): 3515,4450 3555,4490 6360,4490 6390,4460 6360,4430 6360,1815 6295,1750 3525,1750 3525,1790 3435,1880 3435,4360 3475,4400
IOVREF on Bottom Layer "IOVREF_L04_P003" (solid, pour order 3): 3625,4440 3705,4360 4340,4360 4340,3970 4360,3950 4365,3955 5780,3955 5780,4415 5785,4420 5795,4410 6345,4410 6345,1910 6220,1785 6215,1790 3540,1790 3540,4395 3575,4430

## Keep-outs
Layer 2:
  lines w10: 4950,2625 5172.33,2625 5177.33,2850 4950,2850 4950,2625

## Silkscreen, mask and mechanical layers (free items; w line width, h text height)
Top Overlay:
  drawing of 39 lines, arcs and shapes, not listed
  text "5v" at 4027,3513 h25 r90
  text "USB_OTP" at 4997,3432.83 h35
  text "VREG_AVDD" at 5427,3432.83 h35
  text "DP" at 4032,3413 h25 r90
  text "DM" at 4032,3308 h25 r90
  text "3.3V" at 4662,3217 h35
  text "GND" at 4032,3198 h25 r90
  text "+3.3V" at 4388,3128 h25
  text "3.3V" at 5783,3127 h35 r90
  text "D3" at 4506.57,3022.64 h25 r90
  text "SCK" at 4507,2913 h25 r90
  text "D0" at 4507,2828 h25 r90
  text "SHUNT->" at 5358,2788 h25
  text "DNM" at 5288,2777 h25 r270
  text "DNM" at 4857,2738 h25 r90
  text "D2" at 4507,2728 h25 r90
  text "D1" at 4507,2628 h25 r90
  text "CS" at 4507,2518 h25 r90
  text "DNM" at 5023,2488 h25
  text "GND" at 4433,2433 h25
  text "RP2350 Target Board" at 3930,2185 h120
  text "For ChipWhisperer" at 3929.61,2117.44 h100
  text "REV: 02" at 4973,2018 h25
  text "CW312 Board" at 3929.61,2017.44 h100
Bottom Overlay:
  drawing of 22 lines, arcs and shapes, not listed
  text "NewAE Technology Inc." at 4595,2235 h45
  text "C" at 4518.61,2125.44 h250
  text "p" at 4038.61,2080.44 h250
  text "W" at 4008.61,2055.44 h250
Mechanical 1:
  lines w3.94: 3903.47,4256.98 3903.47,4298.64 cw(c3926.11,4298.64) 3926.11,4321.28 4260.75,4321.28 cw(c4260.75,4288.09) 4293.94,4288.09 4293.94,3898.54 4293.94,3830.52 ; 4392.37,3830.84 4392.37,3898.54 4392.37,4105.09 4412.05,4124.78 5207.33,4124.78 5227.01,4105.09 5227.01,3831.47 ; 5301.81,3831.47 5301.81,4105.09 5321.5,4124.78 5723.07,4124.78 5742.76,4105.09 5742.76,3899.88 5742.76,3827.46 ; 5841.19,3822.97 5841.19,4299.35 cw(c5863.11,4299.35) 5863.11,4321.28 6197.76,4321.28 cw(c6197.76,4305.53) 6213.51,4305.53
  lines w3.97: 4293.94,3830.52 ccw(c4323.02,3830.52) 4323.02,3801.44 4362.96,3801.44 ccw(c4362.96,3830.84) 4392.37,3830.84 ; 5227.01,3831.47 ccw(c5261.04,3831.47) 5261.04,3797.44 5267.78,3797.44 ccw(c5267.78,3831.47) 5301.81,3831.47 ; 5742.76,3827.46 ccw(c5777.78,3827.46) 5777.78,3792.44 5810.66,3792.44 ccw(c5810.66,3822.97) 5841.19,3822.97
  lines w4: 3903.47,4256.98 3903.47,3838.47 cw(c3865,3838.47) 3865,3800 3640,3800 ccw(c3640,3750) 3590,3750 3590,1980 ccw(c3640,1980) 3640,1930 6163.51,1930 ccw(c6163.51,1980) 6213.51,1980 6213.51,4305.53